# EAGLE board AI_EINK (EAGLE 9.6.2), part 1 of 2
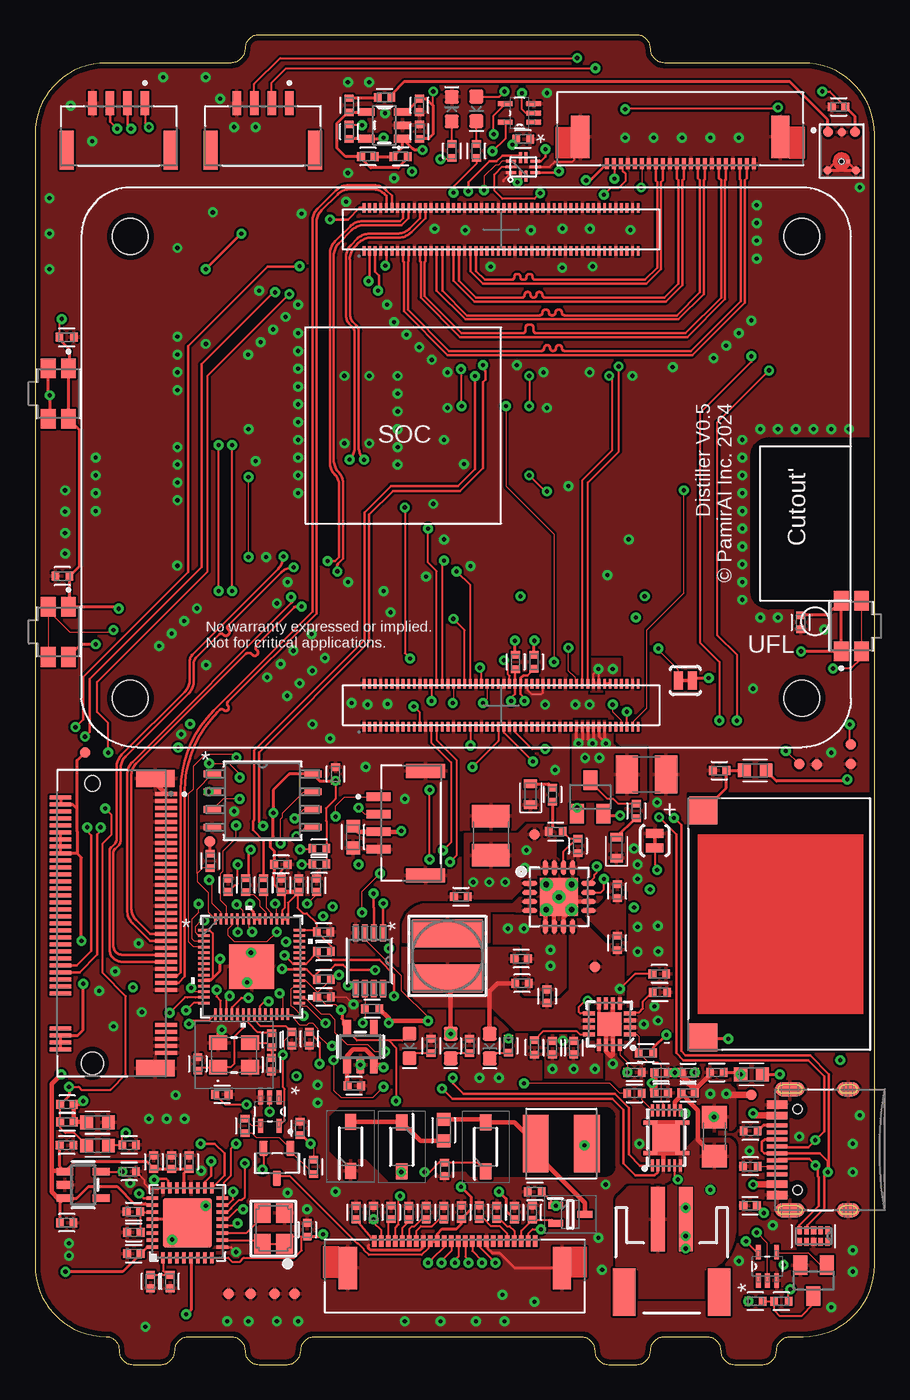
[diagram p0: board, top side]
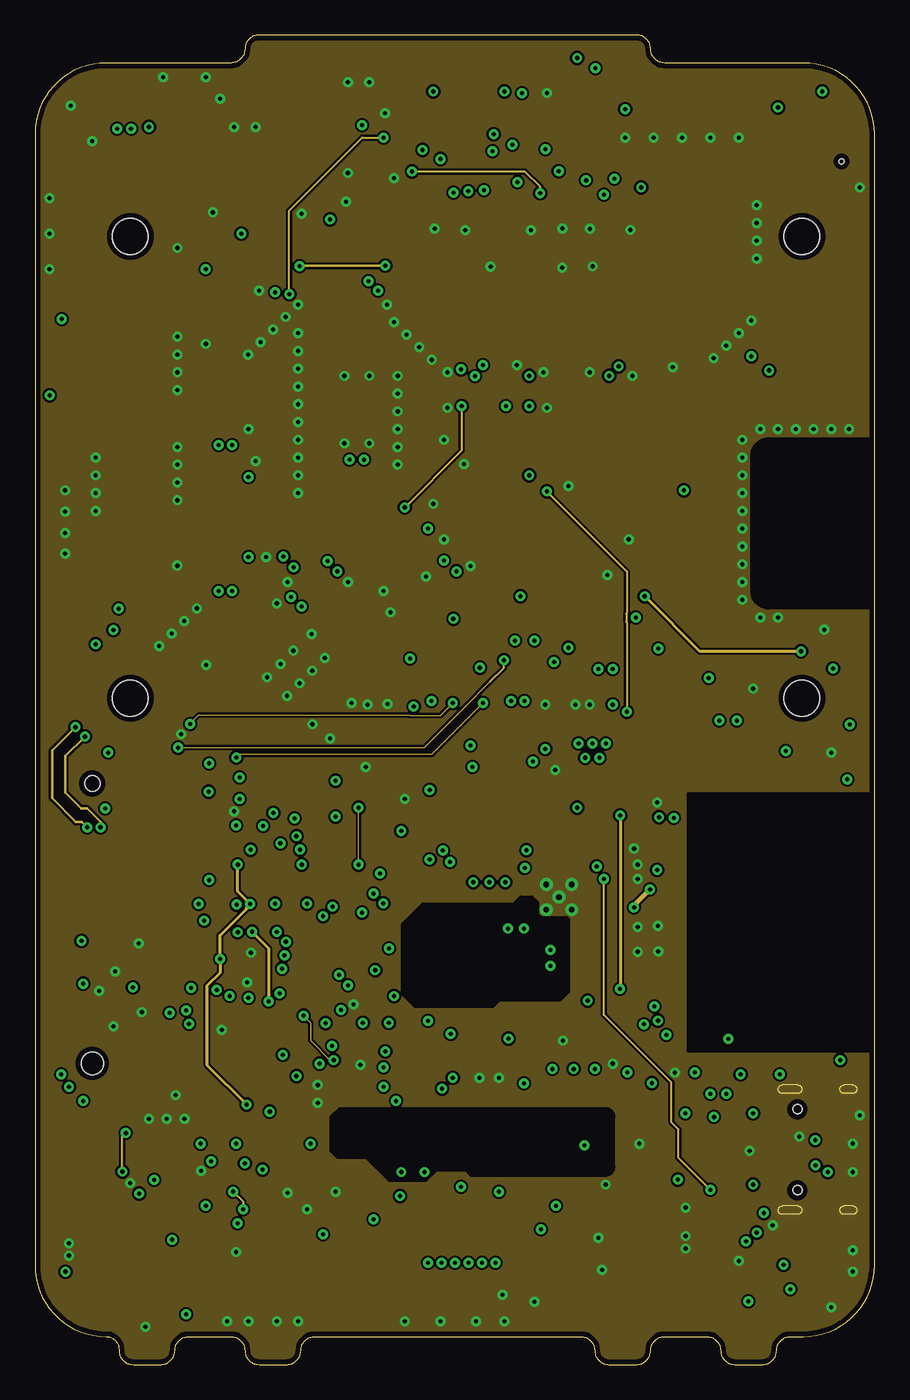
[diagram p1: board, inner layer Route2]
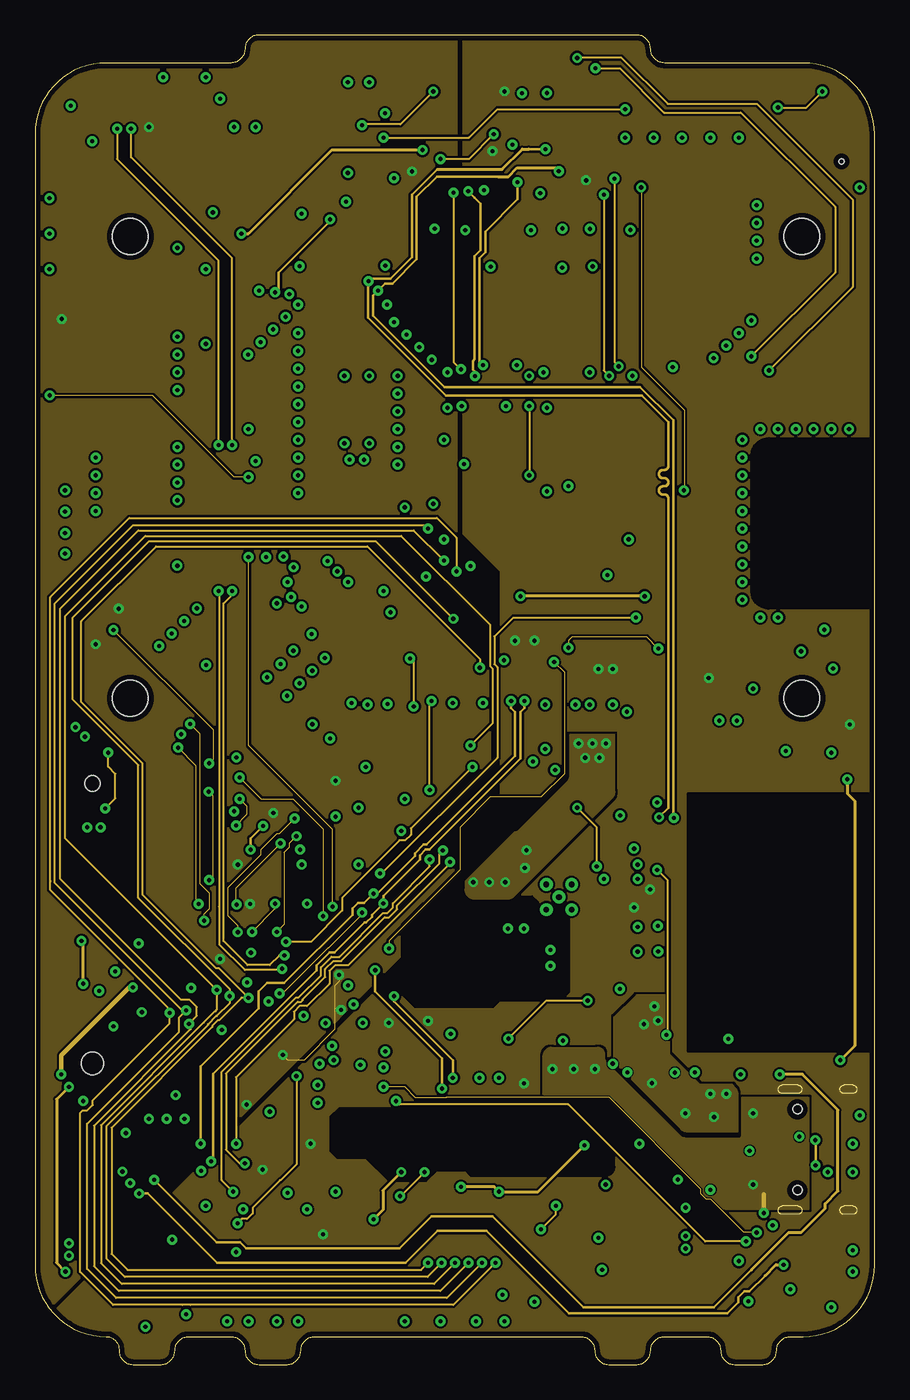
[diagram p2: board, inner layer Route15]
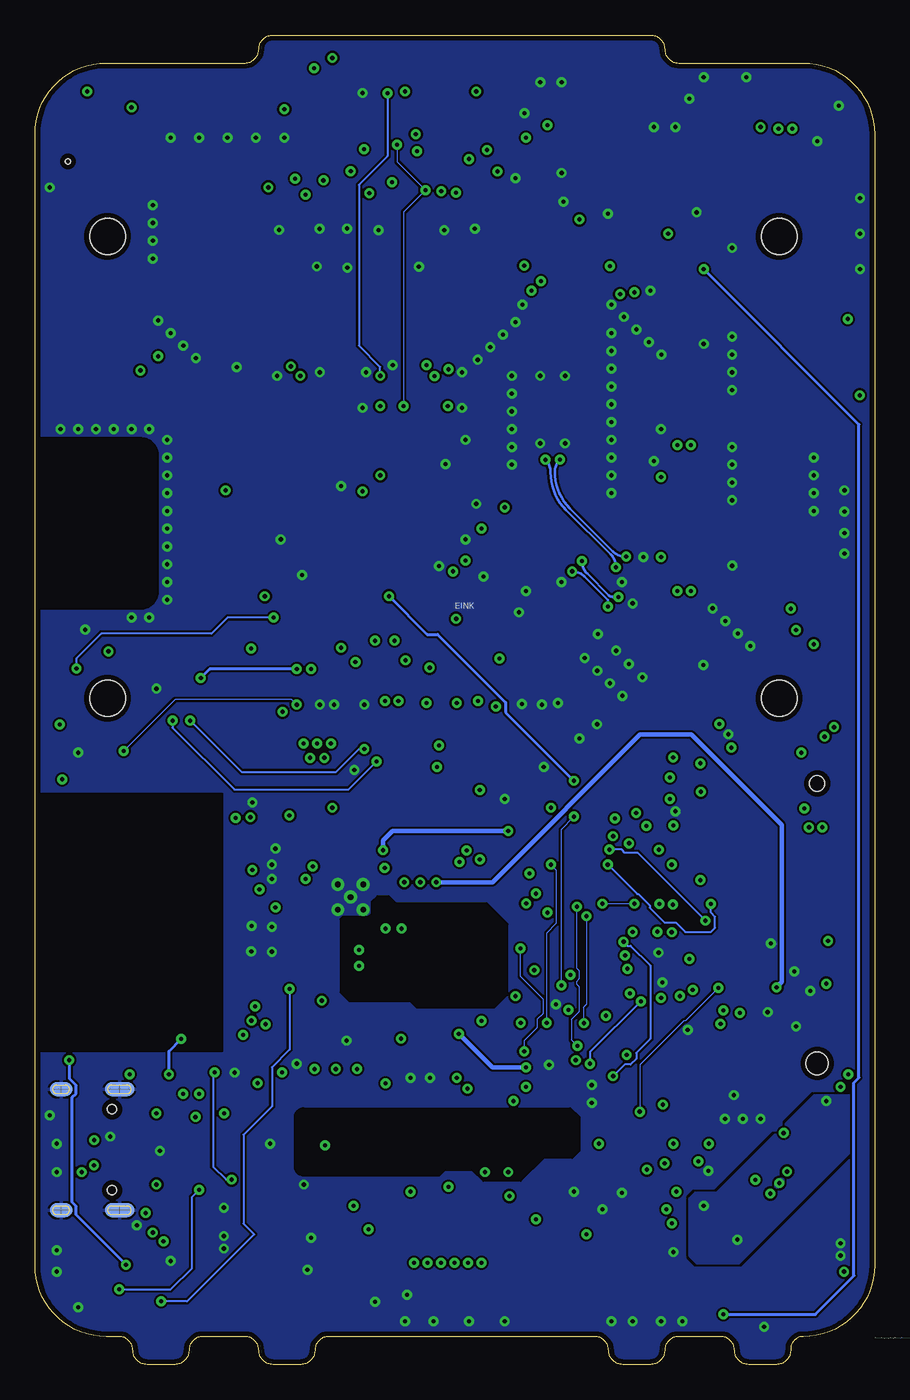
[diagram p3: board, bottom side, seen from below]

Size 60 x 95 mm. Coordinates in mm from the lower left corner, seen from the top.
Outline: 5.08,2 arc-90 6,1.08 6,1 arc90 7,0 9,0 arc90 10,1 arc-90 11,2 14,2 arc-90 15,1 arc90 16,0 18,0 arc90 19,1 arc-90 20,2 39,2 arc-90 40,1 arc90 41,0 43,0 arc90 44,1 arc-90 45,2 48,2 arc-90 49,1 arc90 50,0 52,0 arc90 53,1 arc-90 54,2 54.92,2 arc90 60,7.08 60,87.92 arc90 54.92,93 45,93 arc-90 44,94 arc90 43,95 16,95 arc90 15,94 arc-90 14,93 5.08,93 arc90 0,87.92 0,7.08 arc90 5.08,2
Copper layers (1+2*15+16): Top 0.07mm / dielectric 0.2104mm / Route2 0.0152mm / dielectric 1.065mm / Route15 0.0152mm / dielectric 0.2104mm / Bottom 0.07mm
Design rules "default *": minimum track width 3.5mil, minimum drill 0.3mm, track to track 3.5mil, track to pad 6mil, pad to pad 6mil, via to via 10mil, smd to smd 6mil, copper to edge 15mil, drill to drill 6mil, minimum pad ring 10mil, minimum via ring 8mil, stop-mask expansion 4mil, vias tented up to drill 19mil, thermal gap 6mil
Net classes: 0 default: width 0.089 mm, clearance 0.152 mm; 1 BUS: width 0.305 mm, drill 0.3 mm; 2 1A: width 0.305 mm, drill 0.3 mm; 3 PCIEs: width 0.191 mm, clearance 0.089 mm

## Footprints (pad centres in the part's own frame; a part is rotated, then mirrored left to right if it is on the bottom)
SW_EVQ-P7A01P = smd 1.4 x 1.05: 1_1 -1.8,0.725; 1_2 1.8,0.725; 2_1 -1.8,-0.725; 2_2 1.8,-0.725
CAPC1005X60 = smd 0.56 x 0.629: 1 -0.485,0; 2 0.485,0
C1210 = smd 1.6 x 2.7: 1 -1.4,0; 2 1.4,0
CAPC1608X85 = smd 0.921 x 0.97: 1 -0.775,0; 2 0.775,0
QFN56_7X7_RPI = smd 0.813 x 0.178: 1 -3.404,2.6; 2 -3.404,2.2; 3 -3.404,1.8; 4 -3.404,1.4; 5 -3.404,1; 6 -3.404,0.6; 7 -3.404,0.2; 8 -3.404,-0.2; 9 -3.404,-0.6; 10 -3.404,-1; 11 -3.404,-1.4; 12 -3.404,-1.8; 13 -3.404,-2.2; 14 -3.404,-2.6; 29 3.404,-2.6; 30 3.404,-2.2; 31 3.404,-1.8; 32 3.404,-1.4; 33 3.404,-1; 34 3.404,-0.6; 35 3.404,-0.2; 36 3.404,0.2; 37 3.404,0.6; 38 3.404,1; 39 3.404,1.4; 40 3.404,1.8; 41 3.404,2.2; 42 3.404,2.6 | smd 0.178 x 0.813: 15 -2.6,-3.404; 16 -2.2,-3.404; 17 -1.8,-3.404; 18 -1.4,-3.404; 19 -1,-3.404; 20 -0.6,-3.404; 21 -0.2,-3.404; 22 0.2,-3.404; 23 0.6,-3.404; 24 1,-3.404; 25 1.4,-3.404; 26 1.8,-3.404; 27 2.2,-3.404; 28 2.6,-3.404; 43 2.6,3.404; 44 2.2,3.404; 45 1.8,3.404; 46 1.4,3.404; 47 1,3.404; 48 0.6,3.404; 49 0.2,3.404; 50 -0.2,3.404; 51 -0.6,3.404; 52 -1,3.404; 53 -1.4,3.404; 54 -1.8,3.404; 55 -2.2,3.404; 56 -2.6,3.404 | smd 3.2 x 3.2: 57 0,0
CON_524372271_MOL = smd 0.3 x 0.8: 1 -5.25,2.5; 2 -4.75,2.5; 3 -4.25,2.5; 4 -3.75,2.5; 5 -3.25,2.5; 6 -2.75,2.5; 7 -2.25,2.5; 8 -1.75,2.5; 9 -1.25,2.5; 10 -0.75,2.5; 11 -0.25,2.5; 12 0.25,2.5; 13 0.75,2.5; 14 1.25,2.5; 15 1.75,2.5; 16 2.25,2.5; 17 2.75,2.5; 18 3.25,2.5; 19 3.75,2.5; 20 4.25,2.5; 21 4.75,2.5; 22 5.25,2.5 | smd 1.3 x 3.05: P1 -7.15,0.575; P2 7.15,0.575
LED-0603@1 = smd 1 x 1: A -0.877,0; C 0.877,0
SOD3716X135N = smd 1.15 x 0.8: 1 -1.75,0; 2 1.75,0
LED-0603 = smd 1 x 1: A -0.877,0; C 0.877,0
CON_524372471_MOL = smd 0.3 x 0.8: 1 -5.75,2.5; 2 -5.25,2.5; 3 -4.75,2.5; 4 -4.25,2.5; 5 -3.75,2.5; 6 -3.25,2.5; 7 -2.75,2.5; 8 -2.25,2.5; 9 -1.75,2.5; 10 -1.25,2.5; 11 -0.75,2.5; 12 -0.25,2.5; 13 0.25,2.5; 14 0.75,2.5; 15 1.25,2.5; 16 1.75,2.5; 17 2.25,2.5; 18 2.75,2.5; 19 3.25,2.5; 20 3.75,2.5; 21 4.25,2.5; 22 4.75,2.5; 23 5.25,2.5; 24 5.75,2.5 | smd 1.3 x 3.05: P1 -7.65,0.575; P2 7.65,0.575
BEADC1608X95N = smd 0.9 x 0.97: 1 -0.785,0 | smd 0.933 x 0.97: 2 0.769,0
PAD.03X.03 = smd 0.762 x 0.762: P$1 0,0
QFN32_5MM = smd 0.8 x 0.25: 1 -2.5,1.75; 2 -2.5,1.25; 3 -2.5,0.75; 4 -2.5,0.25; 5 -2.5,-0.25; 6 -2.5,-0.75; 7 -2.5,-1.25; 8 -2.5,-1.75; 17 2.5,-1.75; 18 2.5,-1.25; 19 2.5,-0.75; 20 2.5,-0.25; 21 2.5,0.25; 22 2.5,0.75; 23 2.5,1.25; 24 2.5,1.75 | smd 0.25 x 0.8: 9 -1.75,-2.5; 10 -1.25,-2.5; 11 -0.75,-2.5; 12 -0.25,-2.5; 13 0.25,-2.5; 14 0.75,-2.5; 15 1.25,-2.5; 16 1.75,-2.5; 25 1.75,2.5; 26 1.25,2.5; 27 0.75,2.5; 28 0.25,2.5; 29 -0.25,2.5; 30 -0.75,2.5; 31 -1.25,2.5; 32 -1.75,2.5 | smd 3.5 x 3.5: 33 0,0
JST_BM04B-GHS-TBT(LF)(SN)(N) = smd 0.6 x 1.7: 1 1.875,3.35; 2 0.625,3.35; 3 -0.625,3.35; 4 -1.875,3.35 | smd 1 x 2.8: S1 -3.725,0; S2 3.725,0
USB-C-16P = smd 0.3 x 1.45: A5 -1.25,0; A6 -0.25,0; A7 0.25,0; A8 1.25,0; B5 1.75,0; B6 0.75,0; B7 -0.75,0; B8 -1.75,0 | smd 0.6 x 1.45: GND -3.225,0; GND2 3.225,0 | smd 1 x 2.1: SHLD1 -4.32,-0.915; SHLD2 4.32,-0.915 | smd 1 x 2.1 bottom: SHLD3 -4.32,-0.915; SHLD4 4.32,-0.915 | smd 1 x 1.6: SHLD5 -4.32,-5.095; SHLD8 4.32,-5.095 | smd 1 x 1.6 bottom: SHLD6 -4.32,-5.095; SHLD7 4.32,-5.095 | smd 0.55 x 1.45: VBUS1 -2.45,0; VBUS2 2.45,0 | hole 0.65: -2.89,-1.445; 2.89,-1.445
JST-2-SMD = smd 1 x 4.6: 1 -1,-3.7; 2 1,-3.7 | smd 1.6 x 3.4: NC1 -3.4,1.5; NC2 3.4,1.5
INDUCTOR_5X5MM_TDK_VLC5045 = smd 2 x 5: P$1 -1.6,0; P$2 1.6,0
IND_LQH5BPN2R2NT0L = smd 1.85 x 4.1: 1 -1.825,0; 2 1.825,0
LEDC1608X65N_RND-R = smd 0.612 x 0.912: A 0.75,0; C -0.75,0
CUI_CMS-18138A-SP = smd 2 x 2: N 5.42,8.1; P 5.42,-8.1
TE_1-2199119-5 = smd 0.3 x 1.55: 1 -9.25,3.775; 2 -9,-3.775; 3 -8.75,3.775; 4 -8.5,-3.775; 5 -8.25,3.775; 6 -8,-3.775; 7 -7.75,3.775; 8 -7.5,-3.775; 9 -7.25,3.775; 10 -7,-3.775; 11 -6.75,3.775; 12 -6.5,-3.775; 13 -6.25,3.775; 14 -6,-3.775; 15 -5.75,3.775; 16 -5.5,-3.775; 17 -5.25,3.775; 18 -5,-3.775; 19 -4.75,3.775; 20 -4.5,-3.775; 21 -4.25,3.775; 22 -4,-3.775; 23 -3.75,3.775; 24 -3.5,-3.775; 25 -3.25,3.775; 26 -3,-3.775; 27 -2.75,3.775; 28 -2.5,-3.775; 29 -2.25,3.775; 30 -2,-3.775; 31 -1.75,3.775; 32 -1.5,-3.775; 33 -1.25,3.775; 34 -1,-3.775; 35 -0.75,3.775; 36 -0.5,-3.775; 37 -0.25,3.775; 38 0,-3.775; 39 0.25,3.775; 40 0.5,-3.775; 41 0.75,3.775; 42 1,-3.775; 43 1.25,3.775; 44 1.5,-3.775; 45 1.75,3.775; 46 2,-3.775; 47 2.25,3.775; 48 2.5,-3.775; 49 2.75,3.775; 50 3,-3.775; 51 3.25,3.775; 52 3.5,-3.775; 53 3.75,3.775; 54 4,-3.775; 55 4.25,3.775; 56 4.5,-3.775; 57 4.75,3.775; 58 5,-3.775; 67 7.25,3.775; 68 7.5,-3.775; 69 7.75,3.775; 70 8,-3.775; 71 8.25,3.775; 72 8.5,-3.775; 73 8.75,3.775; 74 9,-3.775; 75 9.25,3.775 | smd 1.2 x 2.75: SH1 -10.35,3; SH2 10.35,3 | hole 1.1: -10,-1.5 | hole 1.6: 10,-1.5
OSC_3.2X2.5MM = smd 1.4 x 1.2: 1 -1.1,-0.8; 2 1.1,-0.8; 3 1.1,0.8; 4 -1.1,0.8
SOT65P210X110-3N = smd 1.05 x 0.5: 1 -1.05,0.65; 2 -1.05,-0.65; 3 1.05,0
SOT96P240X110-3N = smd 1.09 x 0.61: 1 -1.07,0.96; 2 -1.07,-0.96; 3 1.07,0
SOT23 = smd 1 x 1.4: 1 -0.95,-1.1; 2 0.95,-1.1; 3 0,1.1
RESC1005X40 = smd 0.535 x 0.644: 1 -0.507,0; 2 0.507,0
1206 = smd 1.6 x 1.8: 1 -1.4,0; 2 1.4,0
RPI-CM4 = smd 0.2 x 0.7: 1 34.8,38.54; 2 34.8,35.46; 3 34.4,38.54; 4 34.4,35.46; 5 34,38.54; 6 34,35.46; 7 33.6,38.54; 8 33.6,35.46; 9 33.2,38.54; 10 33.2,35.46; 11 32.8,38.54; 12 32.8,35.46; 13 32.4,38.54; 14 32.4,35.46; 15 32,38.54; 16 32,35.46; 17 31.6,38.54; 18 31.6,35.46; 19 31.2,38.54; 20 31.2,35.46; 21 30.8,38.54; 22 30.8,35.46; 23 30.4,38.54; 24 30.4,35.46; 25 30,38.54; 26 30,35.46; 27 29.6,38.54; 28 29.6,35.46; 29 29.2,38.54; 30 29.2,35.46; 31 28.8,38.54; 32 28.8,35.46; 33 28.4,38.54; 34 28.4,35.46; 35 28,38.54; 36 28,35.46; 37 27.6,38.54; 38 27.6,35.46; 39 27.2,38.54; 40 27.2,35.46; 41 26.8,38.54; 42 26.8,35.46; 43 26.4,38.54; 44 26.4,35.46; 45 26,38.54; 46 26,35.46; 47 25.6,38.54; 48 25.6,35.46; 49 25.2,38.54; 50 25.2,35.46; 51 24.8,38.54; 52 24.8,35.46; 53 24.4,38.54; 54 24.4,35.46; 55 24,38.54; 56 24,35.46; 57 23.6,38.54; 58 23.6,35.46; 59 23.2,38.54; 60 23.2,35.46; 61 22.8,38.54; 62 22.8,35.46; 63 22.4,38.54; 64 22.4,35.46; 65 22,38.54; 66 22,35.46; 67 21.6,38.54; 68 21.6,35.46; 69 21.2,38.54; 70 21.2,35.46; 71 20.8,38.54; 72 20.8,35.46; 73 20.4,38.54; 74 20.4,35.46; 75 20,38.54; 76 20,35.46; 77 19.6,38.54; 78 19.6,35.46; 79 19.2,38.54; 80 19.2,35.46; 81 18.8,38.54; 82 18.8,35.46; 83 18.4,38.54; 84 18.4,35.46; 85 18,38.54; 86 18,35.46; 87 17.6,38.54; 88 17.6,35.46; 89 17.2,38.54; 90 17.2,35.46; 91 16.8,38.54; 92 16.8,35.46; 93 16.4,38.54; 94 16.4,35.46; 95 16,38.54; 96 16,35.46; 97 15.6,38.54; 98 15.6,35.46; 99 15.2,38.54; 100 15.2,35.46; 101 34.8,4.54; 102 34.8,1.46; 103 34.4,4.54; 104 34.4,1.46; 105 34,4.54; 106 34,1.46; 107 33.6,4.54; 108 33.6,1.46; 109 33.2,4.54; 110 33.2,1.46; 111 32.8,4.54; 112 32.8,1.46; 113 32.4,4.54; 114 32.4,1.46; 115 32,4.54; 116 32,1.46; 117 31.6,4.54; 118 31.6,1.46; 119 31.2,4.54; 120 31.2,1.46; 121 30.8,4.54; 122 30.8,1.46; 123 30.4,4.54; 124 30.4,1.46; 125 30,4.54; 126 30,1.46; 127 29.6,4.54; 128 29.6,1.46; 129 29.2,4.54; 130 29.2,1.46; 131 28.8,4.54; 132 28.8,1.46; 133 28.4,4.54; 134 28.4,1.46; 135 28,4.54; 136 28,1.46; 137 27.6,4.54; 138 27.6,1.46; 139 27.2,4.54; 140 27.2,1.46; 141 26.8,4.54; 142 26.8,1.46; 143 26.4,4.54; 144 26.4,1.46; 145 26,4.54; 146 26,1.46; 147 25.6,4.54; 148 25.6,1.46; 149 25.2,4.54; 150 25.2,1.46; 151 24.8,4.54; 152 24.8,1.46; 153 24.4,4.54; 154 24.4,1.46; 155 24,4.54; 156 24,1.46; 157 23.6,4.54; 158 23.6,1.46; 159 23.2,4.54; 160 23.2,1.46; 161 22.8,4.54; 162 22.8,1.46; 163 22.4,4.54; 164 22.4,1.46; 165 22,4.54; 166 22,1.46; 167 21.6,4.54; 168 21.6,1.46; 169 21.2,4.54; 170 21.2,1.46; 171 20.8,4.54; 172 20.8,1.46; 173 20.4,4.54; 174 20.4,1.46; 175 20,4.54; 176 20,1.46; 177 19.6,4.54; 178 19.6,1.46; 179 19.2,4.54; 180 19.2,1.46; 181 18.8,4.54; 182 18.8,1.46; 183 18.4,4.54; 184 18.4,1.46; 185 18,4.54; 186 18,1.46; 187 17.6,4.54; 188 17.6,1.46; 189 17.2,4.54; 190 17.2,1.46; 191 16.8,4.54; 192 16.8,1.46; 193 16.4,4.54; 194 16.4,1.46; 195 16,4.54; 196 16,1.46; 197 15.6,4.54; 198 15.6,1.46; 199 15.2,4.54; 200 15.2,1.46 | hole 2.55: 3.5,3.5; 3.5,36.5; 51.5,36.5; 51.5,3.5
PAD-JUMPER-2-NC_BY_TRACE_YES_SILK = smd 0.635 x 1.27: 1 -0.508,0; 2 0.508,0
SC59-BEC = smd 1 x 1.4: B -0.95,-1.2; C 0,1.2; E 0.95,-1.2
PVQFN-16 = smd 1.05 x 0.35: 1 -2.1,0.975; 2 -2.1,0.325; 3 -2.1,-0.325; 4 -2.1,-0.975; 9 2.1,-0.975; 10 2.1,-0.325; 11 2.1,0.325; 12 2.1,0.975 | smd 0.35 x 1.05: 5 -0.975,-2.1; 6 -0.325,-2.1; 7 0.325,-2.1; 8 0.975,-2.1; 13 0.975,2.1; 14 0.325,2.1; 15 -0.325,2.1; 16 -0.975,2.1 | drill 0.4: P$18 0,0; P$19 -0.9,0.9; P$20 0.9,0.9; P$21 0.9,-0.9; P$22 -0.9,-0.9 | smd 2.7 x 2.7: THERMAL 0,0
SOT65P210X110-5N = smd 1.016 x 0.356: 1 -1.016,0.66; 2 -1.016,0; 3 -1.016,-0.66; 4 1.016,-0.66; 5 1.016,0.66
PDSO-N12 = smd 0.2 x 0.85: 1 -1,-1.975; 2 -0.6,-1.975; 3 -0.2,-1.975; 4 0.2,-1.975; 5 0.6,-1.975; 6 1,-1.975; 7 1,1.975; 8 0.6,1.975; 9 0.2,1.975; 10 -0.2,1.975; 11 -0.6,1.975; 12 -1,1.975 | smd 1.95 x 1.95: EP 0,0 | smd 1 x 0.25: EP1 -1.15,1.1; EP2 -1.15,-1.1; EP3 1.15,-1.1; EP4 1.15,1.1
PVQFN-N16 = smd 0.28 x 0.85: 1 -0.75,-1.475; 2 -0.25,-1.475; 3 0.25,-1.475; 4 0.75,-1.475; 9 0.75,1.475; 10 0.25,1.475; 11 -0.25,1.475; 12 -0.75,1.475 | smd 0.85 x 0.28: 5 1.475,-0.75; 6 1.475,-0.25; 7 1.475,0.25; 8 1.475,0.75; 13 -1.475,0.75; 14 -1.475,0.25; 15 -1.475,-0.25; 16 -1.475,-0.75 | smd 1.7 x 1.7: EP 0,0
SOIC_128JVSIQ_WIN-L = smd 1.219 x 0.483: 1 -3.594,1.905; 2 -3.594,0.635; 3 -3.594,-0.635; 4 -3.594,-1.905; 5 3.594,-1.905; 6 3.594,-0.635; 7 3.594,0.635; 8 3.594,1.905
MSOP8_MC_MCH-L = smd 1.219 x 0.406: 1 -1.994,0.975; 2 -1.994,0.325; 3 -1.994,-0.325; 4 -1.994,-0.975; 5 1.994,-0.975; 6 1.994,-0.325; 7 1.994,0.325; 8 1.994,0.975
SOT23-5 = smd 0.55 x 1.2: 1 -0.95,-1.3; 2 0,-1.3; 3 0.95,-1.3; 4 0.95,1.3; 5 -0.95,1.3
XDCR_SPU0410LR5H-QB = smd 0.723 x 0.723: 1 -0.966,1.369; 4 0.966,1.369 | smd 0.562 x 0.562: 2 -1.015,-1.369; 3 1.015,-1.369 | smd 0.612 x 0.612: 5 0,1.369 | smd 0.25 x 0.25: 6 0.47,-0.74 | hole 0.35: 0,-0.735
DQA10 = smd 0.55 x 0.3: 1 -0.41,1; 2 -0.41,0.5; 4 -0.41,-0.5; 5 -0.41,-1; 6 0.41,-1; 7 0.41,-0.5; 9 0.41,0.5; 10 0.41,1 | smd 0.55 x 0.4: 3 -0.41,0; 8 0.41,0
10-UFQFN = smd 0.8 x 0.2: 1 -0.66,0.203; 2 -0.66,-0.203; 6 0.66,-0.203; 7 0.66,0.203 | smd 0.2 x 0.7: 3 -0.406,-0.864; 5 0.406,-0.864; 8 0.406,0.864; 10 -0.406,0.864 | smd 0.2 x 0.8: 4 0,-0.864; 9 0,0.864
ABM8272T3 = smd 1.3 x 1.05: 1 -1.15,-0.875; 2 1.15,-0.875; 3 1.15,0.875; 4 -1.15,0.875

## Placement (x,y rotation side)
BUD  EVQ-P7A01P  [SW_EVQ-P7A01P]  1.67,52.36 270 top
BUP  EVQ-P7A01P  [SW_EVQ-P7A01P]  1.67,69.37 270 top
BUS  EVQ-P7A01P  [SW_EVQ-P7A01P]  58.35,52.76 90 top
C1  10uF  [CAPC1005X60]  34.75,29 0 top
C2  2.2uF  [CAPC1005X60]  30.44,33.43 180 top
C3  10uF  [CAPC1005X60]  51.11,11.35 180 top
C4  0.1uF  [CAPC1005X60]  34.8,27.24 0 top
C5  1uF  [CAPC1005X60]  33,10.87 90 top
C6  100uF  [C1210]  32.58,37.79 90 top
C7  10uF  [CAPC1005X60]  18.94,16.87 90 top
C8  1uF  [CAPC1005X60]  31.74,10.88 90 top
C9  1uF  [CAPC1005X60]  30.48,10.88 90 top
C10  1uF  [CAPC1005X60]  29.22,10.86 90 top
C11  1uF  [CAPC1005X60]  27.96,10.87 90 top
C12  1uF  [CAPC1005X60]  26.72,10.86 90 top
C13  1uF  [CAPC1005X60]  25.45,10.87 90 top
C14  1uF  [CAPC1005X60]  24.2,10.86 90 top
C15  1uF  [CAPC1005X60]  22.95,10.86 90 top
C16  1uF  [CAPC1005X60]  29.27,13.95 270 top
C17  4.7uF/50V  [CAPC1005X60]  34.28,10.87 90 top
C18  4.7uF  [CAPC1608X85]  29.21,16.75 90 top
C19  1.0uF  [CAPC1005X60]  46.68,19.41 0 top
C20  0.47uF  [CAPC1005X60]  46.68,20.87 180 top
C21  10uF  [CAPC1005X60]  44.62,27.91 0 top
C22  10uF  [CAPC1005X60]  38.5,22.64 90 top
C23  10uF  [CAPC1005X60]  44.76,19.41 0 top
C24  0.1uF  [CAPC1005X60]  21.48,42.2 270 top
C25  100uF  [C1210]  43.7,42.17 0 top
C26  10uF  [CAPC1005X60]  36.59,26.32 90 top
C27  27pF  [CAPC1005X60]  23.79,86.31 0 top
C29  4.7uF  [CAPC1005X60]  24.98,90.53 180 top
C30  1.0uF  [CAPC1005X60]  27.48,89.97 270 top
C40  10uF  [CAPC1005X60]  44.75,20.86 0 top
C42  0.1uF  [CAPC1608X85]  22.74,37.69 270 top
C43  0.1uF  [CAPC1005X60]  17.61,34.26 90 top
C44  0.1uF  [CAPC1005X60]  13.8,34.26 90 top
C45  10uF  [CAPC1005X60]  7.06,9.45 180 top
C46  10uF  [CAPC1005X60]  9.65,5.94 270 top
C47  0.1uF  [CAPC1005X60]  7.04,10.93 180 top
C48  0.1uF  [CAPC1005X60]  8.26,5.94 270 top
C49  0.1uF  [CAPC1005X60]  19.46,9.63 90 top
C50  0.1uF  [CAPC1005X60]  57.44,89.86 180 top
C53  10uF  [CAPC1005X60]  36.97,22.64 90 top
C58  0.1uF  [CAPC1005X60]  7.06,7.92 180 top
C59  10uF  [CAPC1005X60]  8.49,14.47 90 top
C60  10uF  [CAPC1005X60]  9.76,14.47 90 top
C61  10uF  [CAPC1005X60]  11.01,14.47 90 top
C62  10uF  [CAPC1005X60]  6.73,15.69 0 top
C63  100pF  [CAPC1005X60]  48.92,42.44 180 top
C64  100pF  [CAPC1005X60]  48.73,20.87 180 top
C65  10uF  [CAPC1005X60]  2.27,10.13 0 top
C66  2.2uF+  [CAPC1005X60]  2.26,15.68 0 top
C67  0.1uF  [CAPC1005X60]  2.29,17.34 0 top
C68  10uF  [CAPC1005X60]  2.29,18.59 0 top
C69  0.1uF  [CAPC1005X60]  6.73,13.79 0 top
C71  0.1uF  [CAPC1005X60]  13.36,19.3 0 top
C72  0.1uF  [CAPC1005X60]  20.63,30.91 0 top
C73  0.1uF  [CAPC1005X60]  17.58,35.73 0 top
C74  0.1uF  [CAPC1005X60]  18.35,23.27 270 top
C75  1.0uF  [CAPC1005X60]  18.86,34.26 90 top
C76  1.0uF  [CAPC1005X60]  20.12,34.25 90 top
C77  0.1uF  [CAPC1005X60]  19.61,23.27 270 top
C79  10uF  [CAPC1005X60]  22.81,19.91 0 top
C80  10uF  [CAPC1005X60]  20.65,26.26 0 top
C82  15p  [CAPC1005X60]  11.64,21.48 90 top
C83  15p  [CAPC1005X60]  16.89,21.43 90 top
C2040  RP2040TR13QFN56_7X7_RPI  [QFN56_7X7_RPI]  15.48,28.43 0 top
CAMERA  C262642  [CON_524372271_MOL]  46.12,88.3 180 top
D1  ACT (MHT192JGCT)  [LED-0603@1]  31.54,89.72 270 top
D2  MBR0530  [SOD3716X135N]  22.56,15.58 90 top
D3  MBR0530  [SOD3716X135N]  26.21,15.56 270 top
D4  MBR0530  [SOD3716X135N]  32.21,15.56 90 top
D5  CHARGING FC-1608B1-470  [LED-0603]  32.5,22.74 270 top
D6  PMIC  [LED-0603]  29.71,22.76 270 top
D7  PMIC  [LED-0603]  26.76,22.77 270 top
EINK_524352471  524372471  [CON_524372471_MOL]  30,6.32 0 top
FB1  FERRITE_BEAD  [BEADC1608X95N]  4.46,15.65 180 top
FB2  FERRITE_BEAD  [BEADC1608X95N]  51.45,42.45 180 top
FB3  FERRITE_BEAD  [BEADC1608X95N]  51.2,20.73 180 top
FB5  FERRITE_BEAD  [BEADC1608X95N]  4.46,17.3 180 top
GND  DNP  [PAD.03X.03]  13.84,5.05 0 top
GND13  DNP  [PAD.03X.03]  58.29,42.92 0 top
GND22  DNP  [PAD.03X.03]  17.13,5.05 0 top
GND26  DNP  [PAD.03X.03]  15.41,5.05 0 top
GND27  DNP  [PAD.03X.03]  18.57,5.05 0 top
GND34  DNP  [PAD.03X.03]  55.87,42.88 0 top
IC3  WM8960  [QFN32_5MM]  10.9,10.13 90 top
J1  BM04B-GHS-TBT(LF)(SN)(N)  [JST_BM04B-GHS-TBT(LF)(SN)(N)]  27.9,38.69 90 top
J2  C393939  [USB-C-16P]  53.04,15.35 90 top
JOY_STICK  BM04B-GHS-TBT(LF)(SN)(N)  [JST_BM04B-GHS-TBT(LF)(SN)(N)]  5.99,86.77 0 top
JP6  S2B-PH-SM4-TB  [JST-2-SMD]  45.5,6.68 180 top
L1  6.8uH C36410  [INDUCTOR_5X5MM_TDK_VLC5045]  29.47,29.2 90 top
L3  FNR5012S100MT 10uH  [IND_LQH5BPN2R2NT0L]  37.61,15.78 180 top
LED2  LED_RED  [LEDC1608X65N_RND-R]  35.41,40.74 90 top
LED3  SYS_POW (19-213/Y2C-CQ2R2L/3T(CY))  [LED-0603]  29.79,89.7 90 top
LOW_BATT  LED_RED  [LEDC1608X65N_RND-R]  41.56,36.93 90 top
LS1  CMS-18138A-SP  [CUI_CMS-18138A-SP]  53.19,31.48 180 top
M.2KEYM(NGFF)  1-2199119-5 OR C841645  [TE_1-2199119-5]  5.6,31.53 270 top
OSC2  ECS-3225MV  [OSC_3.2X2.5MM]  17.04,9.72 90 top
Q1  SI1308EDL-T1-GE3  [SOT65P210X110-3N]  38.26,10.72 0 top
Q2  DMG2307L  [SOT96P240X110-3N]  17.29,14.38 270 top
Q3  NMOS_C7465427  [SOT23]  55.64,6 180 top
R1  1.87M (TPA2005D1DRBR)  [RESC1005X40]  41.61,30.13 270 top
R2  340K (RTT053403FTP)  [RESC1005X40]  41.61,33.83 270 top
R3  1.87M  [RESC1005X40]  37.21,38.08 180 top
R4  200K  [RESC1005X40]  38.79,37.05 90 top
R5  1K  [RESC1005X40]  36.98,40.72 90 top
R6  590  [RESC1005X40]  42.84,20.87 0 top
R7  1.1k  [RESC1005X40]  35.7,22.66 270 top
R8  1k  [RESC1005X40]  29.8,86.71 270 top
R9  0.47  [RESC1005X40]  35.54,10.86 270 top
R10  1k  [RESC1005X40]  31.54,86.71 270 top
R11  10K  [RESC1005X40]  35.72,12.35 0 top
R12  0.01  [1206]  48.56,16.29 270 top
R13  200K  [RESC1005X40]  53.34,4.51 0 top
R14  1K  [RESC1005X40]  28.31,22.77 90 top
R15  4.7K  [RESC1005X40]  35.66,50.22 90 top
R16  10k  [RESC1005X40]  1.96,56.33 0 top
R17  10k  [RESC1005X40]  54.72,53.03 90 top
R18  4.7K  [RESC1005X40]  34.34,50.19 90 top
R19  5.1K  [RESC1005X40]  51.12,14.15 0 top
R20  1K  [RESC1005X40]  42.97,39.56 90 top
R21  5.1k  [RESC1005X40]  51.13,16.68 0 top
R22  180  [RESC1005X40]  33.83,22.78 90 top
R23  1K  [RESC1005X40]  31.07,22.77 90 top
R24  100k  [RESC1005X40]  44.66,26.6 0 top
R25  4.7K  [RESC1005X40]  20.64,29.51 0 top
R26  4.7K  [RESC1005X40]  20.64,27.53 0 top
R27  10k  [RESC1005X40]  22.46,88.09 270 top
R28  10k  [RESC1005X40]  2.26,73.4 180 top
R29  10K  [RESC1005X40]  43.67,22.27 180 top
R30  36k  [RESC1005X40]  24.08,25.42 0 top
R31  27  [RESC1005X40]  15.07,34.26 270 top
R32  27  [RESC1005X40]  16.34,34.26 270 top
R33  10K  [RESC1005X40]  42.84,19.38 180 top
R34  1k  [RESC1005X40]  12.53,35.99 90 top
R35  1k  [RESC1005X40]  16.92,23.18 270 top
R36  200K  [RESC1005X40]  51.49,4.51 0 top
R37  10k  [RESC1005X40]  27.49,88.09 270 top
R38  4.7k  [RESC1005X40]  22.46,89.97 90 top
R39  300k  [RESC1005X40]  26.13,86.31 0 top
R40  4.7K  [RESC1005X40]  20.32,36.87 0 top
R41  47K  [RESC1005X40]  34.88,87.56 0 top
R42  4.7K  [RESC1005X40]  20.32,35.76 0 top
R43  10K  [RESC1005X40]  19.9,14.13 270 top
R44  6.57k  [RESC1005X40]  15,17.05 90 top
RPI-CM1  DF40C-100DS-0.4V(51)  [RPI-CM4]  58.31,84.11 180 top
RPIBOOT  DNP  [PAD.03X.03]  54.61,42.89 0 top
RPIBOOT1  DNP  [PAD.03X.03]  35.69,37.89 0 top
RPIBOOT2  DNP  [PAD.03X.03]  58.29,44.32 0 top
RPIBOOT3  DNP  [PAD.03X.03]  3.57,43.72 0 top
RPIBOOT4  DNP  [PAD.03X.03]  40.03,28.42 0 top
RPIBOOT5  TEST-POINT3  [PAD.03X.03]  51.18,19.27 0 top
SJ1  DNP  [PAD-JUMPER-2-NC_BY_TRACE_YES_SILK]  44.29,37.43 270 top
SJ6  DNP  [PAD-JUMPER-2-NC_BY_TRACE_YES_SILK]  46.48,48.87 180 top
SOM_UART  BM04B-GHS-TBT(LF)(SN)(N)  [JST_BM04B-GHS-TBT(LF)(SN)(N)]  16.29,86.78 0 top
T1  MMUN2133LT1G  [SC59-BEC]  39.69,40.56 0 top
U1  TPS61092RSAR  [PVQFN-16]  37.45,33.4 0 top
U2  MC74VHC1G14DFT1G  [SOT65P210X110-5N]  34.63,89.42 180 top
U3  BQ27441DRZR-G1A  [PDSO-N12]  45.12,16.2 0 top
U4  BQ24075  [PVQFN-N16]  41.05,24.33 90 top
U5  MC74VHC1G14DFT1G OR C66196  [SOT65P210X110-5N]  16.78,18.07 270 top
U6  W25Q128JVSIQSOIC_128JVSIQ_WIN-L  [SOIC_128JVSIQ_WIN-L]  16.27,40.29 0 top
U8  MC74VHC1G14DFT1G  [SOT65P210X110-5N]  52.34,7.02 90 top
U9  EMC2301-1-ACZL-TRMSOP8_MC_MCH-L  [MSOP8_MC_MCH-L]  23.89,28.85 270 top
U10  AP2112-3.3K  [SOT23-5]  3.44,12.84 270 top
U11  AP2112-3.3K  [SOT23-5]  23.26,22.71 0 top
U12  C233266  [XDCR_SPU0410LR5H-QB]  57.65,86.7 0 top
U13  TPD4EUSB30DQARDQA10  [DQA10]  55.64,9.18 270 top
U14  OPA344  [SOT23-5]  24.98,88.55 90 top
USB2.0MUX  TS3USB30RSWR  [10-UFQFN]  34.89,85.57 90 top
USB_BOOT_N  DNP  [PAD.03X.03]  12.5,37.39 0 top
Y1  ABM8-272-T3  [ABM8272T3]  14.23,22.12 0 top

## Library data of the parts
BUD BUP BUS = EVQ-P7A01P; MANUFACTURER: Panasonic Electronic Components; MAXIMUM_PACKAGE_HEIGHT: 1.35mm; PARTREV: 2022.4; STANDARD: Manufacturer Recommendations
C1-C5 C7-C19 C21-C24 C26 C27 C29 C30 C40 C42-C50 C53 C58-C69 C71-C77 C79 C80 C82 C83 = Capacitor; CATEGORY: Capacitor
C6 C25 = rcl
C20 = Capacitor; CATEGORY: Capacitor; PROD_ID: CAP-13216
C2040 = 2024-03-10_01-36-20_Library; COPYRIGHT: Copyright (C) 2024 Ultra Librarian. All rights reserved.; MANUFACTURER_PART_NUMBER: RP2040TR13; MFR_NAME: Raspberry Pi
CAMERA = 2024-03-29_02-21-27_Library; COPYRIGHT: Copyright (C) 2024 Ultra Librarian. All rights reserved.; MANUFACTURER_PART_NUMBER: 524372271; MFR_NAME: Molex Connector Corporation
D1 = SparkFun-LED; PROD_ID: DIO-00821
D2-D4 = MBR0530; AVAILABILITY: In Stock; CHECK_PRICES: https://www.snapeda.com/parts/MBR0530/Onsemi/view-part/?ref=eda; DESCRIPTION: Diode Schottky 30 V 500mA Surface Mount SOD-123; MF: ON Semiconductor; MP: MBR0530; PACKAGE: SOD-123-2 ON Semiconductor; PRICE: None; PURCHASE-URL: https://www.snapeda.com/api/url_track_click_mouser/?unipart_id=179458&manufacturer=ON Semiconductor&part_name=MBR0530&search_term=None; SNAPEDA_LINK: https://www.snapeda.com/parts/MBR0530/Onsemi/view-part/?ref=snap
D5 = SparkFun-LED; PROD_ID: DIO-08575
D6 D7 = SparkFun-LED; PROD_ID: DIO-00819
EINK_524352471 = 2024-02-19_09-48-43_Library; COPYRIGHT: Copyright (C) 2024 Ultra Librarian. All rights reserved.; DIGI-KEY_PART_NUMBER_1: WM7980TR-ND; DIGI-KEY_PART_NUMBER_2: WM7980CT-ND; DIGI-KEY_PART_NUMBER_3: WM7980DKR-ND; MANUFACTURER_PART_NUMBER: 524372471; MFR_NAME: Molex Connector Corporation
FB1-FB3 FB5 = Filter; CATEGORY: Filter; SUB-CATEGORY: Ferrite bead
GND GND13 GND22 GND26 GND27 GND34 RPIBOOT RPIBOOT1-RPIBOOT5 USB_BOOT_N = SparkFun-Connectors
IC3 L1 OSC2 U1 U10 U11 = microbuilder
J1 JOY_STICK SOM_UART = BM04B-GHS-TBT_LF__SN__N_; AVAILABILITY: In Stock; CHECK_PRICES: https://www.snapeda.com/parts/BM04B-GHS-TBT%20(LF)(SN)(N)/JST/view-part/?ref=eda; DESCRIPTION: Conn Shrouded Header HDR 4 POS 1.25mm Solder ST Top Entry SMD T/R; MF: JST; MP: BM04B-GHS-TBT (LF)(SN)(N); PACKAGE: None; PRICE: None; SNAPEDA_LINK: https://www.snapeda.com/parts/BM04B-GHS-TBT%20(LF)(SN)(N)/JST/view-part/?ref=snap
J2 = SparkFun-Connectors; PROD_ID: CONN-14122
JP6 = SparkFun-Connectors; BTM_NEG: -; BTM_POS: +; PROD_ID: CONN-11443; TOP_NEG: -; TOP_POS: +
L3 = LQH5BPN2R2NT0L; MANUFACTURER: Murata; MAXIMUM_PACKAGE_HEIGHT: 2.2 mm; PARTREV: N/A; STANDARD: Manufacturer Recommendations
LED2 LOW_BATT = LED; CATEGORY: LED; COLOR: RED; DESCRIPTION: CHIP LED ROUND; SUB-CATEGORY: CHIP; TYPE: ROUND_TOP
LED3 = SparkFun-LED
LS1 = CMS-18138A-SP; AVAILABILITY: In Stock; CHECK_PRICES: https://www.snapeda.com/parts/CMS-18138A-SP/CUI+Devices/view-part/?ref=eda; CUI_PURCHASE_URL: https://www.cuidevices.com/product/audio/speakers/miniature-(10-mm~40-mm)/cms-18138a-sp?utm_source=snapeda.com&utm_medium=referral&utm_campaign=snapedaBOM; DESCRIPTION: 18 x 13 mm, Rectangular Frame, 0.8 W, 8 Ohm, Neodymium Magnet, PEEK Cone, Speaker; MF: CUI Devices; MP: CMS-18138A-SP; PACKAGE: None; PRICE: None; PURCHASE-URL: https://www.snapeda.com/api/url_track_click_mouser/?unipart_id=2680118&manufacturer=CUI Devices&part_name=CMS-18138A-SP&search_term=None; SNAPEDA_LINK: https://www.snapeda.com/parts/CMS-18138A-SP/CUI+Devices/view-part/?ref=snap
M.2KEYM(NGFF) = 1-2199119-5; CHECK_PRICES: https://www.snapeda.com/parts/1-2199119-5/TE+Connectivity+AMP+Connectors/view-part/?ref=eda; COMMENT: 1-2199119-5; DESCRIPTION: M.2 0.5PITCH 3.2H KEY M 15Uinch AU, M.2 Connectors | TE Connectivity 1-2199119-5; DIGIKEY_PART_NUMBER: A115902TR-ND; MF: TE Connectivity; MP: 1-2199119-5; PACKAGE: None; SNAPEDA_LINK: https://www.snapeda.com/parts/1-2199119-5/TE+Connectivity+AMP+Connectors/view-part/?ref=snap
Q1 = SI1308EDL-T1-GE3; AVAILABILITY: In Stock; CHECK_PRICES: https://www.snapeda.com/parts/SI1308EDL-T1-GE3/Vishay+Siliconix/view-part/?ref=eda; DESCRIPTION: Si1308EDL-T1-GE3 N-channel MOSFET Transistor, 1.5 A, 30 V, 3-Pin SC-70 | Siliconix / Vishay SI1308EDL-T1-GE3; MF: Vishay Siliconix; MP: SI1308EDL-T1-GE3; PACKAGE: SOT-323 Vishay Semiconductor; PRICE: None; PURCHASE-URL: https://www.snapeda.com/api/url_track_click_mouser/?unipart_id=274603&manufacturer=Vishay Siliconix&part_name=SI1308EDL-T1-GE3&search_term=si1308edl; SNAPEDA_LINK: https://www.snapeda.com/parts/SI1308EDL-T1-GE3/Vishay+Siliconix/view-part/?ref=snap
Q2 = DMG2307L; AVAILABILITY: In Stock; CHECK_PRICES: https://www.snapeda.com/parts/DMG2307L/Diodes+Inc./view-part/?ref=eda; DESCRIPTION: P-Channel 30 V 2.5A (Ta) 760mW (Ta) Surface Mount SOT-23-3; MF: Diodes Inc.; MP: DMG2307L; PACKAGE: SOT-23 Diodes Inc.; PRICE: None; SNAPEDA_LINK: https://www.snapeda.com/parts/DMG2307L/Diodes+Inc./view-part/?ref=snap
Q3 = Transistor; CATEGORY: Transistor; SUB-CATEGORY: MOSFET; TYPE: N-Channel
R1-R5 R8-R11 R13-R44 = Resistor; CATEGORY: Resistor; SUB-CATEGORY: Fixed
R6 = Resistor; CATEGORY: Resistor; PROD_ID: RES-13217; SUB-CATEGORY: Fixed
R7 = Resistor; CATEGORY: Resistor; PROD_ID: RES-10447; SUB-CATEGORY: Fixed
R12 = SparkFun-Resistors; PROD_ID: RES-13218
RPI-CM1 = RPI-CM4
SJ1 SJ6 = SparkFun-Passives
T1 = transistor
U2 U5 U8 = MC74VHC1G14DFT1G; AVAILABILITY: In Stock; CHECK_PRICES: https://www.snapeda.com/parts/MC74VHC1G14DFT1G/Onsemi/view-part/?ref=eda; DESCRIPTION: MC74VHC1G14DFT1G Schmitt Trigger Inverter, 2 - 5.5 V, 5-Pin SC-88A | ON Semiconductor MC74VHC1G14DFT1G; MF: ON Semiconductor; MP: MC74VHC1G14DFT1G; PACKAGE: SC-88A-5 ON Semiconductor; PRICE: None; SNAPEDA_LINK: https://www.snapeda.com/parts/MC74VHC1G14DFT1G/Onsemi/view-part/?ref=snap
U3 = battery-management-temp; PROD_ID: IC-13220
U4 = battery-management-temp; PROD_ID: IC-13219
U6 = 2024-03-29_04-43-21_Library; COPYRIGHT: Copyright (C) 2024 Ultra Librarian. All rights reserved.; MANUFACTURER_PART_NUMBER: W25Q128JVSIQ; MFR_NAME: Winbond
U9 = 2024-03-07_04-01-04_Library; COPYRIGHT: Copyright (C) 2024 Ultra Librarian. All rights reserved.; MANUFACTURER_PART_NUMBER: EMC2301-1-ACZL-TR; MFR_NAME: Microchip
U12 = SPU0410LR5H-QB; MANUFACTURER: KNOWLES; PARTREV: H; STANDARD: Manufacturer Recommendations
U13 = 2024-03-29_01-35-38_Library; COPYRIGHT: Copyright (C) 2024 Ultra Librarian. All rights reserved.; MANUFACTURER_PART_NUMBER: TPD4EUSB30DQAR; MFR_NAME: Texas Instruments
U14 = SparkFun-IC-Amplifiers; PROD_ID: IC-08251
USB2.0MUX = microbuilder; DESCRIPTION: High-speed USB 2.0 (480-Mbps) 1:2 multiplexer & demultiplexer switch with single enable; DIGI-KEY_PART_NUMBER: 296-22547-2-ND; MF: Texas Instruments; MP: TS3USB30RSWR; PACKAGE: UQFN-10 Texas Instruments; PURCHASE-URL: https://pricing.snapeda.com/search?q=TS3USB30RSWR&ref=eda
Y1 = ABM8-272-T3; DESCRIPTION: Crystal, 12 MHz, SMD, 3.2mm x 2.5mm, 30 ppm, 10 pF, 30 ppm, ABM8 Series; HEIGHT: 0.8mm; MANUFACTURER_NAME: ABRACON; MANUFACTURER_PART_NUMBER: ABM8-272-T3; MOUSER_PART_NUMBER: 815-ABM8-272-T3; MOUSER_PRICE-STOCK: https://www.mouser.co.uk/ProductDetail/ABRACON/ABM8-272-T3?qs=QpmGXVUTftEj6miOiJBMxQ%3D%3D

## Nets
1V8BQ: C20.1 U3.5
3.3V: C7.1 C49.1 CAMERA.22 D1.A IC3.8 IC3.10 OSC2.1 OSC2.4 Q2.2 R15.2 R18.2 R30.2 R33.2 R43.1 RPI-CM1.84 RPI-CM1.86 RPIBOOT2.P$1 SJ6.1 U2.5 U9.3
3V3_EINK: C9.1 C17.1 EINK_524352471.9 EINK_524352471.10 L3.1 Q2.3
5.0V: C2.1 C6.1 C25.1 C42.1 C59.1 C60.1 C61.1 C65.1 C66.1 IC3.21 IC3.26 J1.3 R3.2 R5.1 RPI-CM1.77 RPI-CM1.79 RPI-CM1.81 RPI-CM1.83 RPI-CM1.85 RPI-CM1.87 RPIBOOT1.P$1 U1.1 U1.15 U1.16 U10.1 U10.3
!CE!: R24.1 U4.4
!CHG!: R22.2 U4.9
AGND: C67.2 C68.2 FB5.2 IC3.28 IC3.33
AUDIO_MCLK: IC3.11 OSC2.3
AVDD: C50.1 C58.1 C67.1 C68.1 FB1.2 IC3.32 R27.2 U12.4 U14.5
BATTERY_IN [BUS]: C19.1 JP6.2 R12.2 U3.6 U3.8
BOOST_EN: Q3.3 R13.1 R36.2
BUTTON_D: BUD.2_1 BUD.2_2 C2040.29
BUTTON_S: BUS.2_1 BUS.2_2 C2040.27
BUTTON_U: BUP.2_1 BUP.2_2 C2040.28
CAM0_C_N: RPI-CM1.140
CAM0_C_P: RPI-CM1.142
CAM0_D0_N: RPI-CM1.128
CAM0_D0_P: RPI-CM1.130
CAM0_D1_N: RPI-CM1.134
CAM0_D1_P: RPI-CM1.136
CAM1_C_N [PCIEs]: CAMERA.8 RPI-CM1.127
CAM1_C_P [PCIEs]: CAMERA.9 RPI-CM1.129
CAM1_D0_N [PCIEs]: CAMERA.2 RPI-CM1.115
CAM1_D0_P [PCIEs]: CAMERA.3 RPI-CM1.117
CAM1_D1_N [PCIEs]: CAMERA.5 RPI-CM1.121
CAM1_D1_P [PCIEs]: CAMERA.6 RPI-CM1.123
CAM1_D2_N [PCIEs]: CAMERA.11 RPI-CM1.133
CAM1_D2_P [PCIEs]: CAMERA.12 RPI-CM1.135
CAM1_D3_N [PCIEs]: CAMERA.14 RPI-CM1.139
CAM1_D3_P [PCIEs]: CAMERA.15 RPI-CM1.141
CAM_GPIO: CAMERA.17 RPI-CM1.97
CDD: C10.1 EINK_524352471.7
DSI0_C_N: RPI-CM1.169
DSI0_C_P: RPI-CM1.171
DSI0_D0_N: RPI-CM1.157
DSI0_D0_P: RPI-CM1.159
DSI0_D1_N: RPI-CM1.163
DSI0_D1_P: RPI-CM1.165
DSI1_C_N: RPI-CM1.187
DSI1_C_P: RPI-CM1.189
DSI1_D0_N: RPI-CM1.175
DSI1_D0_P: RPI-CM1.177
DSI1_D1_N: RPI-CM1.181
DSI1_D1_P: RPI-CM1.183
DSI1_D2_N: RPI-CM1.193
DSI1_D2_P: RPI-CM1.195
DSI1_D3_N: RPI-CM1.194
DSI1_D3_P: RPI-CM1.196
EINK_BUSY: C2040.13 EINK_524352471.16 RPI-CM1.40
EINK_CS: C2040.16 EINK_524352471.13 RPI-CM1.39
EINK_D/C: C2040.15 EINK_524352471.14 RPI-CM1.30
EINK_RESET: C2040.14 EINK_524352471.15 RPI-CM1.28
ENABLE: R13.2 U1.11
EXT_VCC_PCIE: M.2KEYM(NGFF).2 M.2KEYM(NGFF).4 M.2KEYM(NGFF).12 M.2KEYM(NGFF).14 M.2KEYM(NGFF).16 M.2KEYM(NGFF).18 M.2KEYM(NGFF).70 M.2KEYM(NGFF).72 M.2KEYM(NGFF).74 RPIBOOT3.P$1
FAN_PWM: J1.1 U9.5
GDR: EINK_524352471.23 Q1.1 R11.2
GND: C1.2 C2.2 C3.2 C4.2 C5.2 C6.2 C7.2 C8.2 C9.2 C10.2 C11.2 C12.2 C13.2 C14.2 C15.2 C16.2 C17.2 C19.2 C20.2 C21.2 C22.2 C23.2 C24.1 C25.2 C26.2 C30.2 C40.2 C42.2 C43.2 C44.2 C45.2 C46.2 C47.2 C48.2 C49.2 C50.2 C53.2 C58.2 C59.2 C60.2 C61.2 C62.2 C63.2 C64.2 C65.2 C66.2 C69.2 C71.2 C72.2 C73.2 C74.2 C75.2 C76.2 C77.2 C79.2 C80.2 C82.2 C83.1 C2040.19 C2040.57 CAMERA.1 CAMERA.4 CAMERA.7 CAMERA.10 CAMERA.13 CAMERA.16 CAMERA.19 CAMERA.P1 CAMERA.P2 D2.1 EINK_524352471.8 EINK_524352471.17 EINK_524352471.P1 EINK_524352471.P2 FB5.1 GND13.P$1 GND22.P$1 GND26.P$1 GND27.P$1 GND34.P$1 GND.P$1 IC3.9 IC3.20 IC3.24 J1.4 J1.S1 J1.S2 J2.GND J2.GND2 J2.SHLD1 J2.SHLD2 J2.SHLD3 J2.SHLD4 J2.SHLD5 J2.SHLD6 J2.SHLD7 J2.SHLD8 JOY_STICK.4 JP6.1 LED2.C LED3.C LOW_BATT.C M.2KEYM(NGFF).1 M.2KEYM(NGFF).3 M.2KEYM(NGFF).9 M.2KEYM(NGFF).15 M.2KEYM(NGFF).21 M.2KEYM(NGFF).27 M.2KEYM(NGFF).33 M.2KEYM(NGFF).39 M.2KEYM(NGFF).45 M.2KEYM(NGFF).51 M.2KEYM(NGFF).57 M.2KEYM(NGFF).71 M.2KEYM(NGFF).73 M.2KEYM(NGFF).75 M.2KEYM(NGFF).SH1 M.2KEYM(NGFF).SH2 OSC2.2 Q3.2 R2.1 R4.1 R6.2 R7.2 R9.1 R11.1 R14.2 R16.1 R17.1 R19.1 R21.1 R23.2 R24.2 R28.1 R37.1 R41.2 RPI-CM1.1 RPI-CM1.2 RPI-CM1.7 RPI-CM1.8 RPI-CM1.13 RPI-CM1.14 RPI-CM1.22 RPI-CM1.23 RPI-CM1.32 RPI-CM1.33 RPI-CM1.42 RPI-CM1.43 RPI-CM1.52 RPI-CM1.53 RPI-CM1.59 RPI-CM1.60 RPI-CM1.65 RPI-CM1.66 RPI-CM1.71 RPI-CM1.74 RPI-CM1.98 RPI-CM1.107 RPI-CM1.108 RPI-CM1.113 RPI-CM1.114 RPI-CM1.119 RPI-CM1.120 RPI-CM1.125 RPI-CM1.126 RPI-CM1.131 RPI-CM1.132 RPI-CM1.137 RPI-CM1.138 RPI-CM1.144 RPI-CM1.150 RPI-CM1.155 RPI-CM1.156 RPI-CM1.161 RPI-CM1.162 RPI-CM1.167 RPI-CM1.168 RPI-CM1.173 RPI-CM1.174 RPI-CM1.179 RPI-CM1.180 RPI-CM1.185 RPI-CM1.186 RPI-CM1.191 RPI-CM1.192 RPI-CM1.197 RPI-CM1.198 SJ1.1 SOM_UART.4 U1.5 U1.6 U1.7 U1.10 U1.13 U1.P$18 U1.P$19 U1.P$20 U1.P$21 U1.P$22 U1.THERMAL U2.3 U3.3 U3.EP U3.EP1 U3.EP2 U3.EP3 U3.EP4 U4.6 U4.8 U4.14 U4.15 U4.EP U5.3 U6.4 U8.3 U9.4 U10.2 U11.2 U12.2 U12.3 U12.5 U12.6 U13.8 U14.2 USB2.0MUX.4 USB2.0MUX.10 Y1.2 Y1.4
GND_2: U13.3
GPOUT: R33.1 U3.12
HDMI0_CEC: RPI-CM1.151
HDMI0_CLK_N: RPI-CM1.190
HDMI0_CLK_P: RPI-CM1.188
HDMI0_HOTPLUG: RPI-CM1.153
HDMI0_SCL: RPI-CM1.200
HDMI0_SDA: RPI-CM1.199
HDMI0_TX0_N: RPI-CM1.184
HDMI0_TX0_P: RPI-CM1.182
HDMI0_TX1_N: RPI-CM1.178
HDMI0_TX1_P: RPI-CM1.176
HDMI0_TX2_N: RPI-CM1.172
HDMI0_TX2_P: RPI-CM1.170
HDMI1_CEC: RPI-CM1.149
HDMI1_CLK_N: RPI-CM1.166
HDMI1_CLK_P: RPI-CM1.164
HDMI1_HOTPLUG: RPI-CM1.143
HDMI1_SCL: RPI-CM1.147
HDMI1_SDA: RPI-CM1.145
HDMI1_TX0_N: RPI-CM1.160
HDMI1_TX0_P: RPI-CM1.158
HDMI1_TX1_N: RPI-CM1.154
HDMI1_TX1_P: RPI-CM1.152
HDMI1_TX2_N: RPI-CM1.148
HDMI1_TX2_P: RPI-CM1.146
I2S_BCLK: IC3.12 RPI-CM1.49
I2S_DIN: IC3.16 RPI-CM1.27
I2S_DOUT: IC3.14 RPI-CM1.25
I2S_LRCLK: IC3.13 IC3.15 RPI-CM1.26
ILIM: R7.1 U4.12
ISET: R6.1 U4.16
LBO: T1.B U1.12
LEFT_N: C64.1 FB3.2 LS1.N
LEFT_P: C63.1 FB2.2 LS1.P
MICBIAS: C46.1 C48.1 IC3.1
N$1: L1.P$2 U1.3 U1.4
N$2: LOW_BATT.A R20.1
N$3: R1.1 R2.2 U1.9
N$4: LED2.A R5.2
N$5: R3.1 R4.2 U1.14
N$6: R20.2 T1.C
N$7: RPI-CM1.78 SJ6.2
N$9: RPI-CM1.95 U2.2
N$10: C29.1 U12.1
N$11: R8.2 U2.4
N$12: LED3.A R8.1
N$13: C27.1 R38.1 R39.2 U14.4
N$14: R10.2 RPI-CM1.21
N$15: D1.C R10.1
N$16: Q3.1 U8.4
N$17: D5.C R22.1
N$18: D7.C R14.1
N$19: C18.1 D2.2 D3.1
N$20: C29.2 R38.2
N$21: D6.C R23.1
N$22: C30.1 R27.1 R37.2 U14.3
N$23: C18.2 D4.2 L3.2 Q1.3
N$24: R34.2 USB_BOOT_N.P$1
N$25: R29.1 SJ1.2
N$26: C83.2 R35.2 Y1.3
N$27: J2.B5 R21.2
N$28: Q2.1 R43.2 R44.1
N$29: R44.2 U5.4
N$30: J2.A5 R19.2
N$40: FB2.1 IC3.25
N$41: FB3.1 IC3.23
N_RPIBOOT: RPI-CM1.93 RPIBOOT.P$1
NC: EINK_524352471.24
OUT: C62.1 C69.1 FB1.1 U10.5
PCIE_!RST [PCIEs]: M.2KEYM(NGFF).50 RPI-CM1.109
PCIE_CLK_!REQ [PCIEs]: M.2KEYM(NGFF).52 RPI-CM1.102
PCIE_CLK_N [PCIEs]: M.2KEYM(NGFF).53 RPI-CM1.112
PCIE_CLK_P [PCIEs]: M.2KEYM(NGFF).55 RPI-CM1.110
PCIE_RX_N [PCIEs]: M.2KEYM(NGFF).41 RPI-CM1.118
PCIE_RX_P [PCIEs]: M.2KEYM(NGFF).43 RPI-CM1.116
PCIE_TX_N [PCIEs]: M.2KEYM(NGFF).47 RPI-CM1.124
PCIE_TX_P [PCIEs]: M.2KEYM(NGFF).49 RPI-CM1.122
PI_1V8: RPI-CM1.88 RPI-CM1.90
PREVGH: C16.1 D4.1 EINK_524352471.4
PREVGL: C14.1 D3.2 EINK_524352471.2
RESE: EINK_524352471.22 Q1.2 R9.2
RESERVED@104: RPI-CM1.104
RESERVED@106: RPI-CM1.106
RINPUT1: C27.2 IC3.5 R39.1 U14.1
SAM_1V1: C76.1 C77.1 C2040.23 C2040.45 C2040.50
SAM_3V3: BUD.1_1 BUD.1_2 BUP.1_1 BUP.1_2 BUS.1_1 BUS.1_2 C24.2 C43.1 C44.1 C71.1 C72.1 C73.1 C74.1 C75.1 C80.1 C2040.1 C2040.10 C2040.22 C2040.33 C2040.42 C2040.43 C2040.44 C2040.48 C2040.49 D7.A JOY_STICK.1 R16.2 R17.2 R25.2 R26.2 R28.2 R40.2 R42.2 U5.5 U6.8 U8.5 U11.5 USB2.0MUX.9
SAM_EINK_ON: C2040.12 U5.2
SAM_GPIO3: C2040.5
SAM_GPIO4: C2040.6
SAM_GPIO5: C2040.7
SAM_GPIO6: C2040.8
SAM_GPIO7: C2040.9
SAM_GPIO8: C2040.11
SAM_GPIO22: C2040.34
SAM_GPIO25: C2040.37
SAM_GPIO26/ADC0: C2040.38
SAM_GPIO27/ADC1: C2040.39
SAM_GPIO28/ADC2: C2040.40
SAM_GPIO29/ADC3: C2040.41
SAM_INTERUPT: C2040.4 RPI-CM1.46
SAM_QSPI_SCLK: C2040.52 U6.6
SAM_QSPI_SCN: C2040.56 R34.1 U6.1
SAM_QSPI_SD0: C2040.53 U6.5
SAM_QSPI_SD1: C2040.55 U6.2
SAM_QSPI_SD2: C2040.54 U6.3
SAM_QSPI_SD3: C2040.51 U6.7
SAM_RUN: C2040.26
SAM_SCL: C2040.35 JOY_STICK.3 R26.1 U3.2
SAM_SDA: C2040.36 JOY_STICK.2 R25.1 U3.1
SAM_SWCLK: C2040.24
SAM_SWD: C2040.25
SAM_USB_DM: C2040.46 R32.2
SAM_USB_DP: C2040.47 R31.2
SAM_USB_SWITCH: C2040.30 R41.1 USB2.0MUX.8
SAM_XIN: C82.1 C2040.20 Y1.1
SAM_XOUT: C2040.21 R35.1
SCL0: CAMERA.20 RPI-CM1.80
SCL1: IC3.17 R18.1 RPI-CM1.56 U9.2
SDA0: CAMERA.21 RPI-CM1.82
SDA1: IC3.18 R15.1 RPI-CM1.58 U9.1
SPI_CLK: C2040.17 EINK_524352471.12 RPI-CM1.38
SPI_MOSI: C2040.18 EINK_524352471.11 RPI-CM1.44
SYS_PI_ON: C2040.32 U8.2
TACH: J1.2 R30.1 U9.6
TS: R29.2 U3.10 U4.1
TSCL: EINK_524352471.19
TSDA: EINK_524352471.18
UART_RXD0: RPI-CM1.51 SOM_UART.3
UART_RXD3_SAM: C2040.2 R40.1 RPI-CM1.34
UART_TXD0: RPI-CM1.55 SOM_UART.2
UART_TXD3_SAM: C2040.3 R42.1 RPI-CM1.54
USB_N: J2.A7 J2.B7 RPI-CM1.103 U13.5 USB2.0MUX.5
USB_OTG_ID: RPI-CM1.101
USB_P: J2.A6 J2.B6 RPI-CM1.105 U13.4 USB2.0MUX.3
USB_SAM_N: R32.1 USB2.0MUX.7
USB_SAM_P: R31.1 USB2.0MUX.1
V_BATT [BUS]: C23.1 C40.1 R12.1 RPIBOOT5.P$1 U3.7 U4.2 U4.3
VBUS [BUS]: C3.1 C22.1 C53.1 J2.VBUS1 J2.VBUS2 U4.13
VCOM: C15.1 EINK_524352471.1
VDAC_COMP: RPI-CM1.111
VGH: C8.1 EINK_524352471.20
VGL: C5.1 EINK_524352471.21
VMID: C45.1 C47.1 IC3.27
VOUT: C1.1 C4.1 C21.1 C26.1 C79.1 D5.A D6.A L1.P$1 R1.2 R36.1 RPIBOOT4.P$1 T1.E U1.8 U4.5 U4.10 U4.11 U11.1 U11.3
VPP: C11.1 EINK_524352471.6
VSH: C12.1 EINK_524352471.5
VSL: C13.1 EINK_524352471.3